# Altium PCB 单595.pcbdoc
Units mm, origin at the board's own origin, x right, y up, seen from the top; angles counter-clockwise.
Board outline 22.23 x 31 mm, 2 copper layers (Top Layer, Bottom Layer); 14 components, 154 nets, 52 pads, 20 vias.
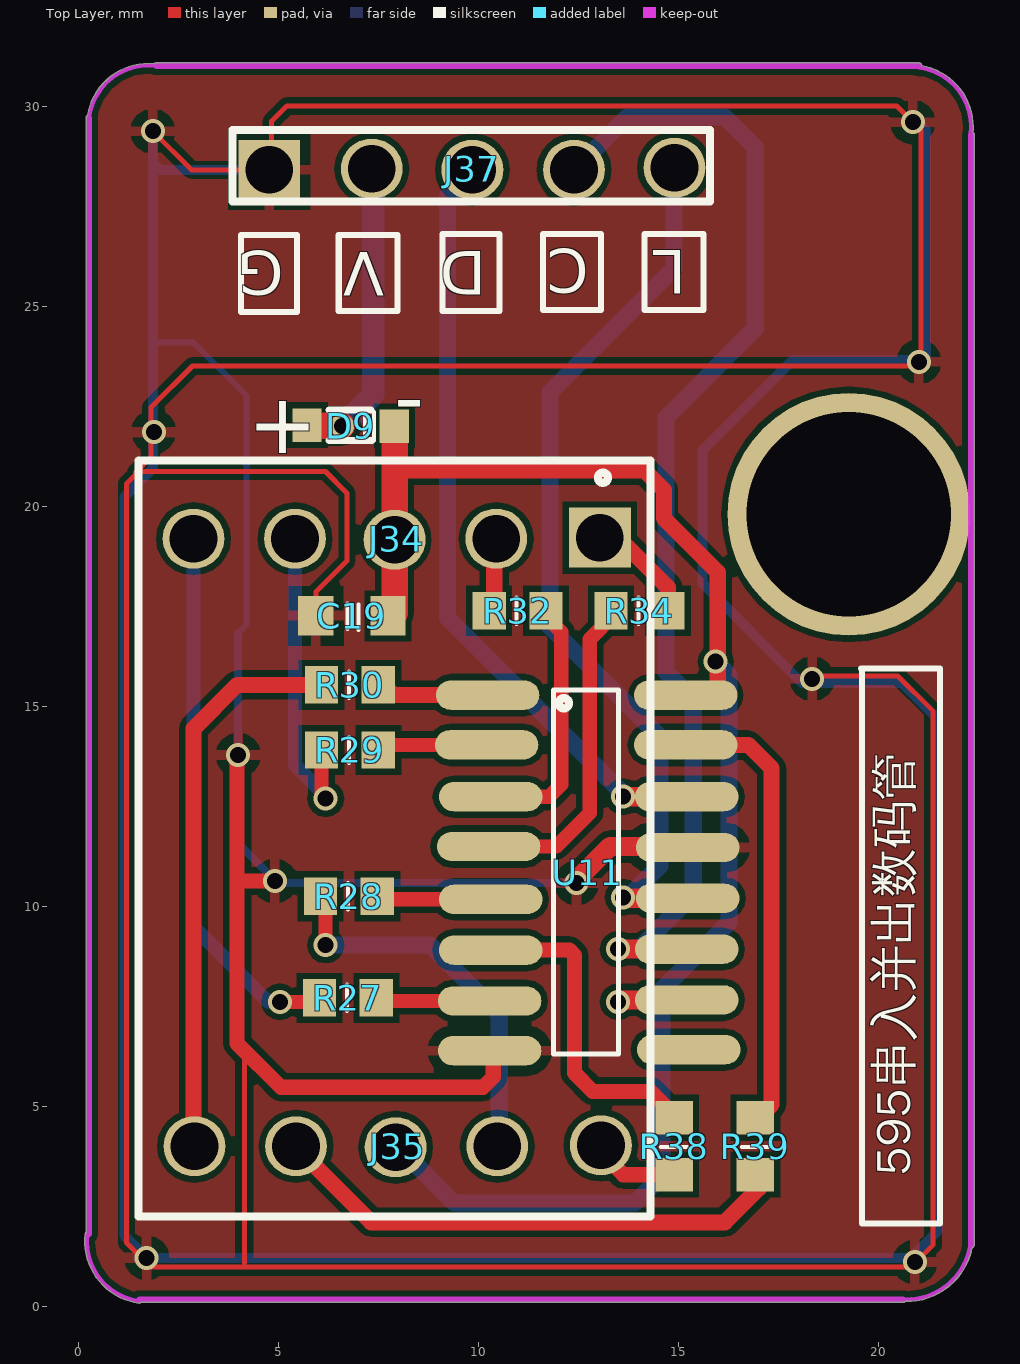
[diagram p0: Top Layer view]
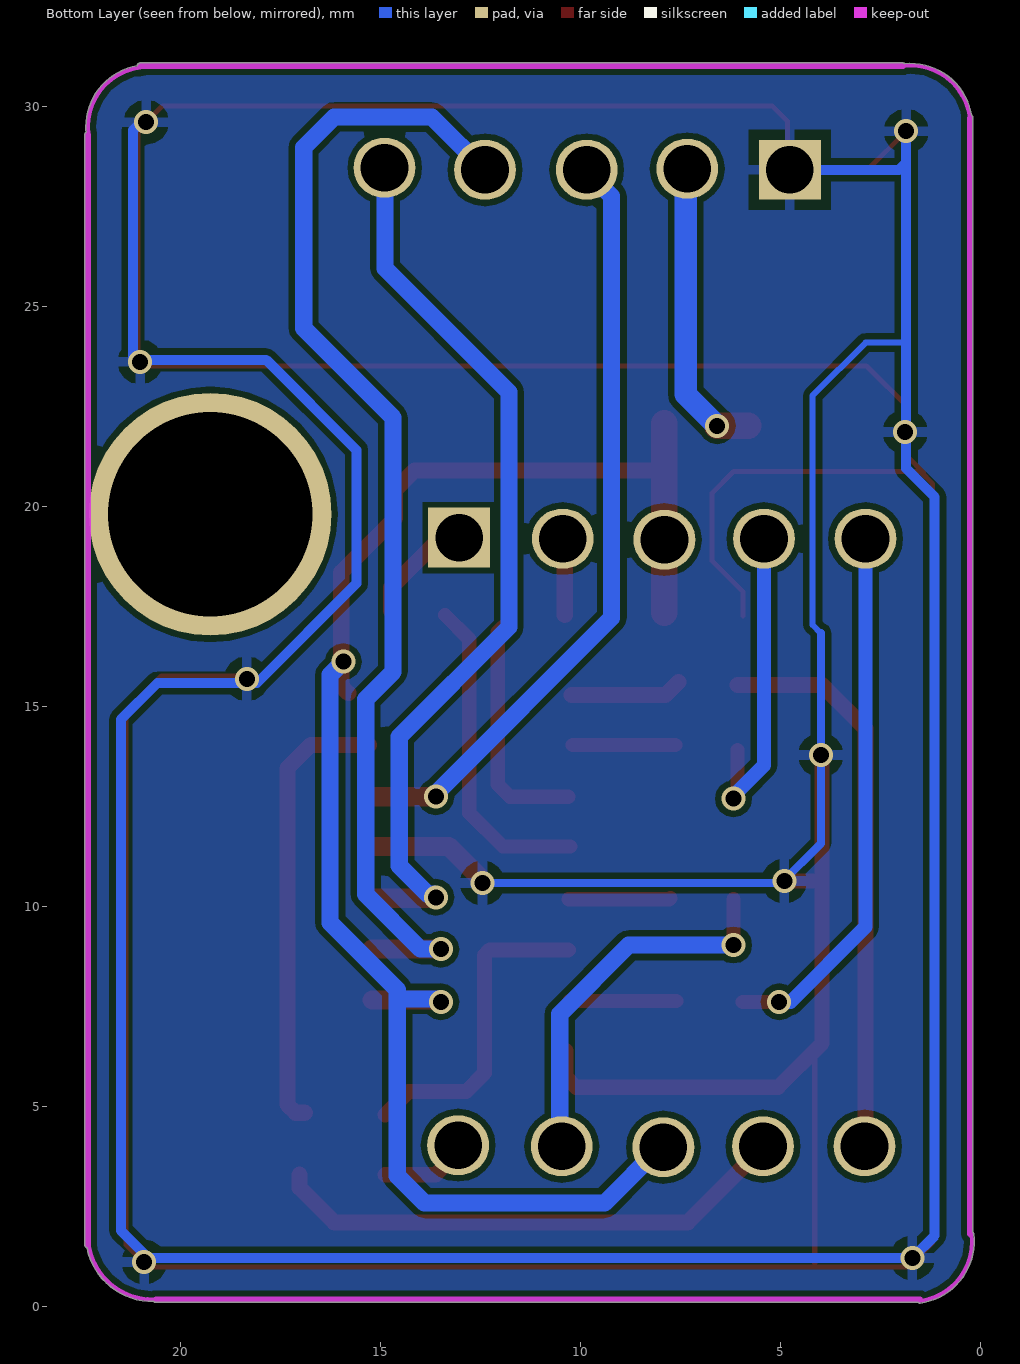
[diagram p1: Bottom Layer view, seen from below]

## Layer stack, top to bottom
Top Solder: solder mask 0.0102, Solder Resist, Dk 3.5
Top Layer: signal copper 0.0356
Dielectric 1: dielectric 0.32, FR-4, Dk 4.8
Bottom Layer: signal copper 0.0356
Bottom Solder: solder mask 0.0102, Solder Resist, Dk 3.5

## Board outline
0.178,1.82 ccw(c1.715,1.623) 1.518,0.086 ccw(c1.524,0.137) 1.562,0.103 20.618,0.103 ccw(c20.618,0.178) 20.671,0.125 ccw(c20.707,1.791) 22.341,1.465 ccw(c22.32,1.537) 22.395,1.537 22.395,29.299 ccw(c22.32,29.299) 22.365,29.359 ccw(c20.821,29.49) 22.37,29.49 ccw(c20.821,29.49) 21.087,31.016 ccw(c21.011,31.014) 21.011,31.089 1.949,31.089 ccw(c1.949,31.014) 1.899,31.07 ccw(c1.758,29.528) 0.23,29.78 ccw(c0.272,29.718) 0.197,29.718 0.197,1.853 ccw(c0.229,1.813)

## Design rules (kind name [scope] priority, off if disabled: settings)
Clearance [All] p1: gap=0.152 ignorepadtopadclearanceinfootprint=FALSE
HoleToHoleClearance [All] p1: gap=0.203 allowstackedmicrovias=TRUE
PolygonConnect [All] p1: connectstyle=Relief reliefconductorwidth=0.254 reliefentries=4 polygonreliefangle="90 Angle" airgapwidth=0.254
RoutingVias [All] p1: holewidth=6 width=8 viastyle="Through Hole" minholewidth=0.3 minwidth=0.6 maxholewidth=0.711 maxwidth=1.27
SilkToSilkClearance [All] p1: silktosilkclearance=0.152
SolderMaskExpansion [All] p1: expansion=0.102
Width [All] p1: maxlimit=5 minlimit=0.203 preferedwidth=0.254
28 further rules are at their usual default settings.

## Components (designator, comment, footprint, x,y, rotation, side; value= is the part's Value field where it differs from the comment)
C19 "104" COMPONENT_4 6.842,17.265 r0 top
D9 "S4" COMPONENT_3 6.807,22.022 r0 top
J34 "5P圆孔排母DS18B20" COMPONENT_2#1 7.959,19.196 r0 top
J35 "5P圆孔排母DS18B20" COMPONENT_2#2 7.985,4.007 r0 top
J37 "2.54排针5P黑色" COMPONENT_1 9.839,28.441 r0 top
R27 "1K" COMPONENT_5 6.74,7.715 r0 top
R28 "1K" COMPONENT_5 6.765,10.255 r0 top
R29 "1K" COMPONENT_5 6.791,13.913 r0 top
R30 "1K" COMPONENT_5 6.791,15.538 r0 top
R32 "1K" COMPONENT_5 10.982,17.392 r0 top
R34 "1K" COMPONENT_5 14.03,17.392 r0 top
R38 "1K" COMPONENT_5 14.893,4.007 r90 top
R39 "1K" COMPONENT_5 16.925,4.007 r90 top
U11 "74HC595D" COMPONENT_6 12.734,10.839 r0 top

## Footprints (in the part's own frame and the unit in brackets; to place one, negate y for a bottom-side part, rotate by r counter-clockwise, add the part's x,y. Pads: shape width x height; smd on the part's side, far side on the other; paste and mask are expansions set on the pad)
COMPONENT_1 [mil]
  rect 60.84x58.84 hole 47: 1(-199.5,-1)
  oval 60.84x58.84 hole 47: 2(-98.5,0) 3(0.5,-1) 4(100.5,-1) 5(199.5,1)
  silkscreen extent -236,-32 234,38
COMPONENT_2#1 [mil]
  rect 60.84x58.84 hole 47: 1(200,1)
  oval 60.84x58.84 hole 47: 2(98,0) 3(-2,-1) 4(-100,0) 5(-200,0)
COMPONENT_2#2 [mil]
  oval 60.84x58.84 hole 47: 1(200,1) 2(98,0) 3(-2,-1) 4(-100,0) 5(-200,0)
COMPONENT_3 [mil]
  rect 28.84x32.84 smd: 1(-43,0.5) 2(43,-0.5)
  silkscreen extent -21,-14 23,16
COMPONENT_4 [mm]
  rect 0.885x0.987 smd: 1(-0.902,0) 2(0.902,0)
  silkscreen extent -0.11,-0.36 0.17,0.3
COMPONENT_5 [mil]
  rect 32.84x36.84 smd: 3(-28,0) 4(28,0)
  silkscreen extent -1,-13 -1,13
COMPONENT_6 [mil]
  oval 101.84x28.84 smd: 1(-98.5,175) 2(-99.5,126) 3(-95.5,75) 4(-97.5,26) 5(-95.5,-26) 6(-95.5,-76) 7(-96.5,-126) 8(-96.5,-175) 9(99.5,-174) 10(97.5,-125) 11(97.5,-75) 12(98.5,-25) 13(98.5,25) 14(97.5,75) 15(96.5,126) 16(96.5,175)
  silkscreen extent -34,-178 30,180

## Free pads (board coordinates)
  round 6.067 hole 5.105: 1(19.262,19.805)

## Via types
v1: diameter 0.6, hole 0.4, Top Layer to Bottom Layer, tented both sides, 19 vias
v2: diameter 0.8, hole 0.4, Top Layer to Bottom Layer, 1 vias

## Nets (pads, with @x,y where several pads share a name; then routed paths per layer and width w, separated by ;. In a path a pad name is that pad's centre, name@x,y a point inside that pad or via, vN(x,y) a via of type N, cw(c..) or ccw(c..) an arc to the next point about the centre after c; other vN are vias at no path point)
3.3V: 
+5v: 
AOUT1: 
AOUT2: 
BOUT1: 
BOUT2: 
D+: 
D-: 
DTR: 
M11: 
M12: 
M21: 
M22: 
Net: 
NewNet1: 
NewNet2: 
NewNet3: 
NewNet4: 
NewNet15: 
NewNet16: 
NewNet17: 
NewNet18: 
NewNet19: 
NewNet20: 
NewNet21: 
NewNet22: 
NewNet23: 
NewNet24: 
NewNet25: 
NewNet26: 
NewNet27: 
NewNet28: 
NewNet29: 
NewNet30: 
NewNet31: 
NewNet32: 
NewNet33: 
NewNet34: 
NewNet35: 
NewNet36: 
NewNet37: 
NewNet38: 
NewNet39: 
NewNet40: 
NewNet41: 
NewNet42: 
NewNet43: 
NewNet44: 
NewNet45: 
NewNet46: 
NewNet47: 
NewNet48: 
NewNet49: 
NewNet50: 
NewNet51: 
NewNet52: 
NewNet53: 
NewNet54: 
NewNet55: 
NewNet56: 
NewNet57: 
NewNet58: 
NewNet59: 
NewNet60: 
NewNet61: 
NewNet62: 
NewNet63: J35.5 R30.3 | length 14
  Top Layer w0.405: J35.5@2.879,4.057 2.879,14.446 3.971,15.538 R30.3
NewNet64: J35.4 R39.3 | length 13
  Top Layer w0.405: J35.4@5.495,3.905 5.521,3.905 7.324,2.102 16.163,2.102 17.027,2.965 R39.3@17.027,3.295
NewNet65: C19.2 D9.2 J34.3 J35.3 U11.10 U11.16 | length 41.5
  Top Layer w0.405: 7.908,20.898 14.157,20.898 14.639,20.415 14.639,19.704 15.986,18.358 15.986,15.513 U11.16@15.808,15.335
  Top Layer w0.481: v1@13.598,7.664 U11.10
  Top Layer w0.659: C19.2@7.908,17.342 D9.2@7.908,22.079
  Bottom Layer w0.43: J35.3 8.01,3.981 9.407,2.584 13.903,2.584 14.589,3.27 14.589,7.563 14.462,7.69 v1@13.547,7.69 ; 14.589,7.385 14.589,7.918 16.265,9.595 16.265,15.792 v1(15.935,16.122)
  other v1: 13.496,7.613
NewNet66: J35.2 R28.3 | length 9.5
  Top Layer w0.354: v1(6.181,9.036) R28.3@6.181,10.179
  Bottom Layer w0.43: v1(6.181,9.036) 8.797,9.036 10.525,7.309 J35.2@10.525,4.057
NewNet67: J35.1 R38.3 | length 2
  Top Layer w0.379: J35.1@13.09,3.829 13.623,3.295 R38.3
NewNet68: J34.5 R27.3 | length 13.6
  Top Layer w0.354: v1(5.038,7.613) R27.3@5.953,7.613
  Bottom Layer w0.354: J34.5 2.879,9.493 4.759,7.613 v1(5.038,7.613)
NewNet69: J34.4 R29.3 | length 8
  Top Layer w0.354: R29.3 6.08,12.795 v1(6.181,12.693)
  Bottom Layer w0.354: J34.4 5.419,13.532 v1@6.156,12.795
NewNet70: J34.2 R32.3 | length 1.8
  Top Layer w0.405: R32.3@10.398,17.291 J34.2@10.398,19.094
NewNet71: J34.1 R34.4 | length 2.7
  Top Layer w0.405: J34.1@13.115,19.145 13.573,19.145 14.741,17.977 R34.4
NewNet72: J37.5 U11.12 | length 22.7
  Top Layer w0.481: v1@13.649,10.204 U11.12
  Bottom Layer w0.43: v1@13.674,10.306 13.827,10.306 14.538,11.017 14.538,14.243 11.795,16.986 11.795,22.853 14.893,25.952 J37.5@14.893,28.594
  other v1: 13.623,10.23
NewNet73: J37.4 U11.11 | length 29.6
  Top Layer w0.481: v1(13.496,8.934) U11.11
  Bottom Layer w0.43: J37.4@12.328,28.289 12.328,28.34 13.725,29.737 16.163,29.737 16.925,28.975 16.925,24.454 14.69,22.218 14.69,15.868 15.376,15.183 15.376,10.306 14.004,8.934 v1(13.496,8.934)
NewNet74: J37.3 U11.14 | length 19.4
  Top Layer w0.481: v1(13.623,12.744) U11.14
  Bottom Layer w0.43: J37.3@9.966,28.492 9.229,27.756 9.229,17.215 v1@13.623,12.82
NewNet75: D9.1 J37.2 | length 7.6
  Top Layer w0.659: D9.1@5.813,22.015 v1(6.588,22.015)
  Bottom Layer w0.557: v1(6.588,22.015) 7.375,22.803 J37.2@7.375,28.518
NewNet76: C19.1 J37.1 U11.8 U11.13 | length 250.6
  Top Layer w0.125: 1.431,20.847 1.812,21.228 1.812,22.472 2.854,23.514 20.913,23.514 21.066,23.666 21.066,29.407 20.456,30.016 5.216,30.016 4.835,29.635 4.835,28.645 4.606,28.416 2.828,28.416 v1(1.863,29.381) ; 4.149,1.086 4.149,6.394 ; C19.1 5.94,17.862 6.715,18.637 6.715,20.339 6.181,20.872 1.508,20.872 1.203,20.567 1.203,1.594 1.812,0.984 20.812,0.984 21.37,1.543 21.37,14.878 20.481,15.767 v1@18.145,15.767
  Top Layer w0.379: v1@3.971,13.811 3.971,6.572 5.064,5.48 10.118,5.48 10.372,5.734 U11.8@10.372,6.394 ; 4.124,10.636 v1(4.911,10.636)
  Top Layer w0.481: v1@12.531,10.738 13.293,11.5 U11.13@15.325,11.5
  Bottom Layer w0.151: 1.863,24.098 2.879,24.098 4.2,22.777 4.2,17.037 3.997,16.834
  Bottom Layer w0.202: 3.997,16.834 3.997,11.576 4.987,10.585 v1(12.455,10.585)
  Bottom Layer w0.252: v1@1.863,29.407 1.863,20.948 1.152,20.237 1.152,1.771 v1(1.711,1.213) 20.812,1.213 21.497,1.898 21.497,14.675 20.583,15.589 18.094,15.589 15.605,18.078 15.605,21.406 17.865,23.666 21.193,23.666 21.193,29.407 v1@20.862,29.737 ; v1@1.863,29.508 1.863,28.594 2.041,28.416 J37.1@5.241,28.416
  other v1: 20.913,1.111 3.997,13.786 18.348,15.691 1.889,21.863 21.015,23.615 20.862,29.61
NewNet77: 
NewNet78: 
NewNet79: 
NewNet80: 
NewNet81: 
NewNet82: 
NewNet83: 
NewNet84: 
NewNet85: 
NewNet86: 
NewNet87: 
NewNet88: 
NewNet89: 
NewNet90: 
NewNet91: 
NewNet92: 
NewNet93: 
NewNet94: 
NewNet95: 
NewNet96: 
NewNet97: 
NewNet100: 
NewNet102: 
NewNet104: 
NewNet105: 
NewNet107: 
NewNet112: 
NewNet113: 
NewNet115: 
NewNet116: 
NewNet117: 
NewNet118: 
NewNet119: 
NewNet120: 
NewNet121: 
NewNet122: 
NewNet123: 
NewNet124: 
NewNet125: 
NewNet126: 
NewNet127: 
NewNet128: 
NewNet129: 
NewNet130: 
NewNet131: 
NewNet132: 
NewNet133: 
NewNet134: R39.4 U11.15 | length 11.2
  Top Layer w0.405: U11.15@15.3,14.04 16.748,14.04 17.332,13.455 17.332,5.048 17.129,4.845 R39.4@16.9,4.845
NewNet135: R27.4 U11.7 | length 2.7
  Top Layer w0.354: R27.4@7.604,7.639 U11.7
NewNet136: R38.4 U11.6 | length 8
  Top Layer w0.379: U11.6 12.277,8.909 12.404,8.782 12.404,5.835 12.861,5.378 14.309,5.378 R38.4@14.893,4.794
NewNet137: R28.4 U11.5 | length 2.6
  Top Layer w0.354: R28.4@7.756,10.204 7.781,10.179 U11.5
NewNet138: R34.3 U11.4 | length 8.1
  Top Layer w0.354: U11.4 11.947,11.5 12.785,12.338 12.785,16.681 R34.3@13.395,17.291
NewNet139: R32.4 U11.3 | length 6.3
  Top Layer w0.354: U11.3 11.769,12.744 12.074,13.049 12.074,16.859 11.769,17.164 R32.4@11.769,17.342
NewNet140: R29.4 U11.2 | length 2.6
  Top Layer w0.354: R29.4@7.629,14.04 U11.2
NewNet141: R30.4 U11.1 | length 2.8
  Top Layer w0.405: R30.4@7.553,15.614 7.883,15.284 U11.1
NewNet142: 
NewNet143: 
NewNet144: 
NewNet145: 
NewNet146: 
NewNet147: 
NewNet148: 
NewNet149: 
NewNet150: 
NewNet151: 
R1: 
R2: 
RTS: 
RXD: 
TXD: 
V3: 
VBUS: 
VIN: 
VM: 
pads on no net: U11.9
copper on no net:
  other v2: -70.282,90.119

## Polygon pours and split planes (outlines as drawn)
NewNet76 on Top Layer "Top Layer-No Net" (solid, pour order 8): 0.178,1.82 ccw(c1.715,1.623) 1.518,0.086 ccw(c1.524,0.137) 1.562,0.103 20.618,0.103 ccw(c20.618,0.178) 20.671,0.125 ccw(c20.707,1.791) 22.341,1.465 ccw(c22.32,1.537) 22.395,1.537 22.395,29.299 ccw(c22.32,29.299) 22.365,29.359 ccw(c20.821,29.49) 22.37,29.49 ccw(c20.821,29.49) 21.087,31.016 ccw(c21.011,31.014) 21.011,31.089 1.949,31.089 ccw(c1.949,31.014) 1.899,31.07 ccw(c1.758,29.528) 0.23,29.78 ccw(c0.272,29.718) 0.197,29.718 0.197,1.853 ccw(c0.229,1.813)
NewNet76 on Bottom Layer "Top Layer-No Net1" (solid, pour order 9): 0.178,1.82 ccw(c1.715,1.623) 1.518,0.086 ccw(c1.524,0.137) 1.562,0.103 20.618,0.103 ccw(c20.618,0.178) 20.671,0.125 ccw(c20.707,1.791) 22.341,1.465 ccw(c22.32,1.537) 22.395,1.537 22.395,29.299 ccw(c22.32,29.299) 22.365,29.359 ccw(c20.821,29.49) 22.37,29.49 ccw(c20.821,29.49) 21.087,31.016 ccw(c21.011,31.014) 21.011,31.089 1.949,31.089 ccw(c1.949,31.014) 1.899,31.07 ccw(c1.758,29.528) 0.23,29.78 ccw(c0.272,29.718) 0.197,29.718 0.197,1.853 ccw(c0.229,1.813)

## Keep-outs
Keep-Out Layer:
  lines w0.102: 0.229,1.813 ccw(c1.715,1.623) 1.524,0.137 ; 0.272,29.718 cw(c1.758,29.528) 1.949,31.014 ; 20.618,0.178 ccw(c20.707,1.791) 22.32,1.702 ; 21.011,30.975 cw(c20.821,29.49) 22.307,29.299
  lines w0.15: 0.272,1.813 0.272,29.718 ; 1.524,0.178 20.618,0.178 ; 1.949,31.014 21.011,31.014 ; 22.32,1.537 22.32,29.299

## Silkscreen, mask and mechanical layers (free items; w line width, h text height)
Top Overlay:
  circle w0.202: c13.115,20.72 r0.127
  lines w0.151: 9.102,26.765 9.102,24.885 10.525,24.885 10.525,26.816 9.102,26.816 ; 14.157,26.765 14.157,24.911 15.63,24.911 15.63,26.816 14.157,26.816 ; 19.567,15.945 21.548,15.945 21.548,2.076 19.592,2.076 19.592,15.945 19.897,15.945 ; 4.073,24.86 4.073,26.79 5.47,26.79 5.47,24.86 4.073,24.86 ; 6.511,24.885 6.511,26.79 7.985,26.79 7.985,24.885 6.511,24.885 ; 11.617,24.911 11.617,26.816 13.065,26.816 13.065,24.911 11.617,24.911
  lines w0.202: 1.508,2.254 1.508,21.152 14.309,21.152 14.309,2.254 1.508,2.254
  text "C" at 12.76,26.435 h1.09 r180
  text "L" at 15.198,26.409 h1.09 r180
  text "G" at 5.14,26.384 h1.09 r180
  text "D" at 10.194,26.384 h1.09 r180
  text "V" at 7.654,26.359 h1.09 r180
  text "-" at 7.899,22.009 h1.52
  text "+" at 4.242,21.336 h1.52
  text "595串入并出数码管" at 21.085,3.27 h1.5 r90